# Altium PCB PCB1.PcbDoc
Units mm, origin at the board's own origin, x right, y up, seen from the top; angles counter-clockwise.
Board outline 28 x 23.8 mm, 2 copper layers (Top Layer, Bottom Layer), stack 1.67 mm thick; 29 components, 25 nets, 135 pads, 35 vias.
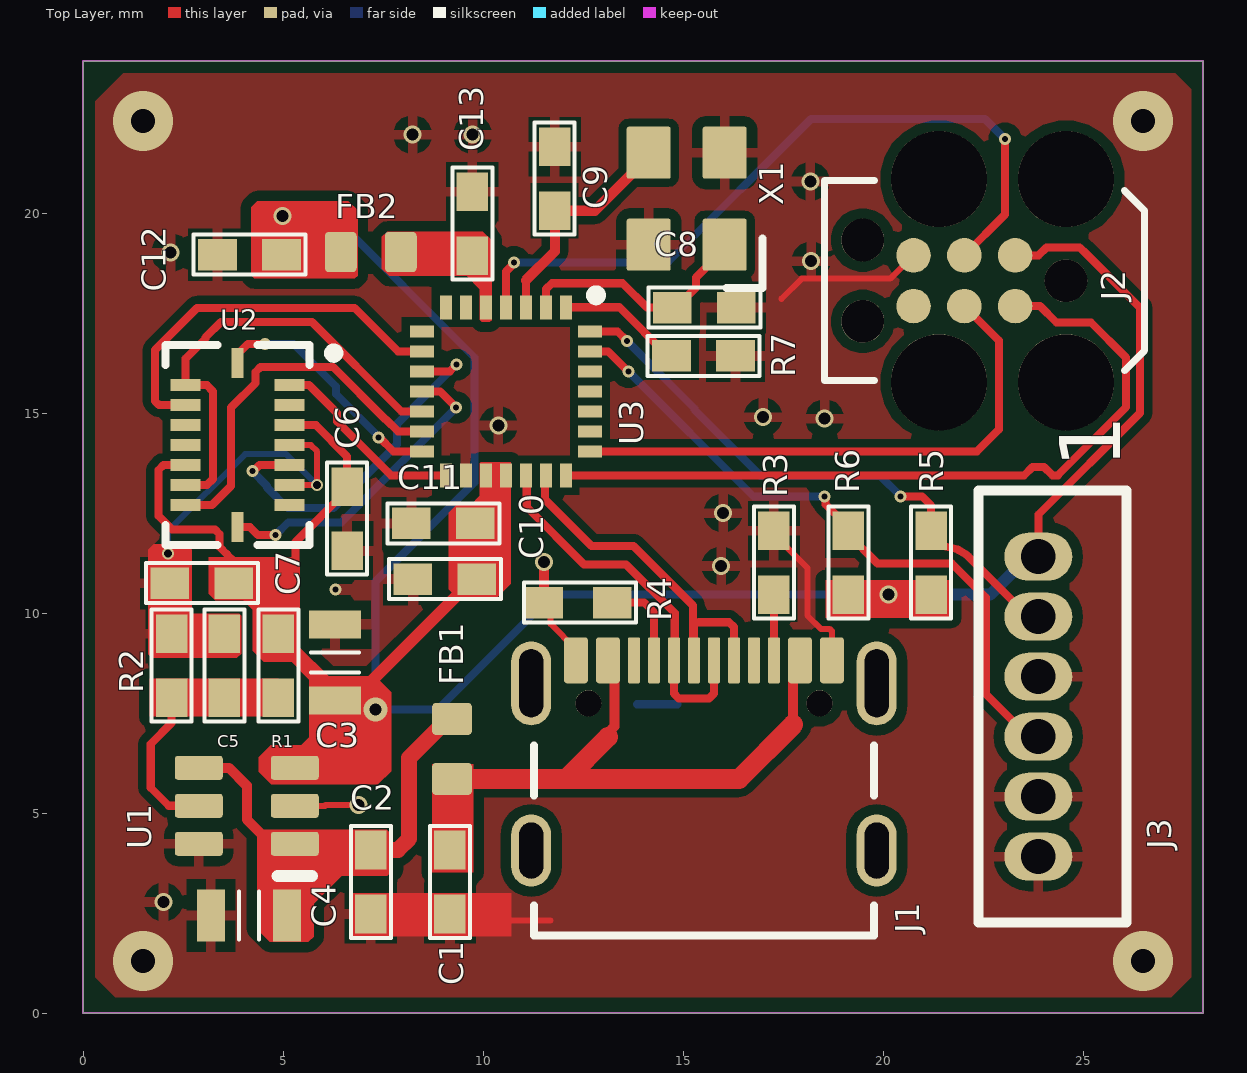
[diagram p0: Top Layer view]
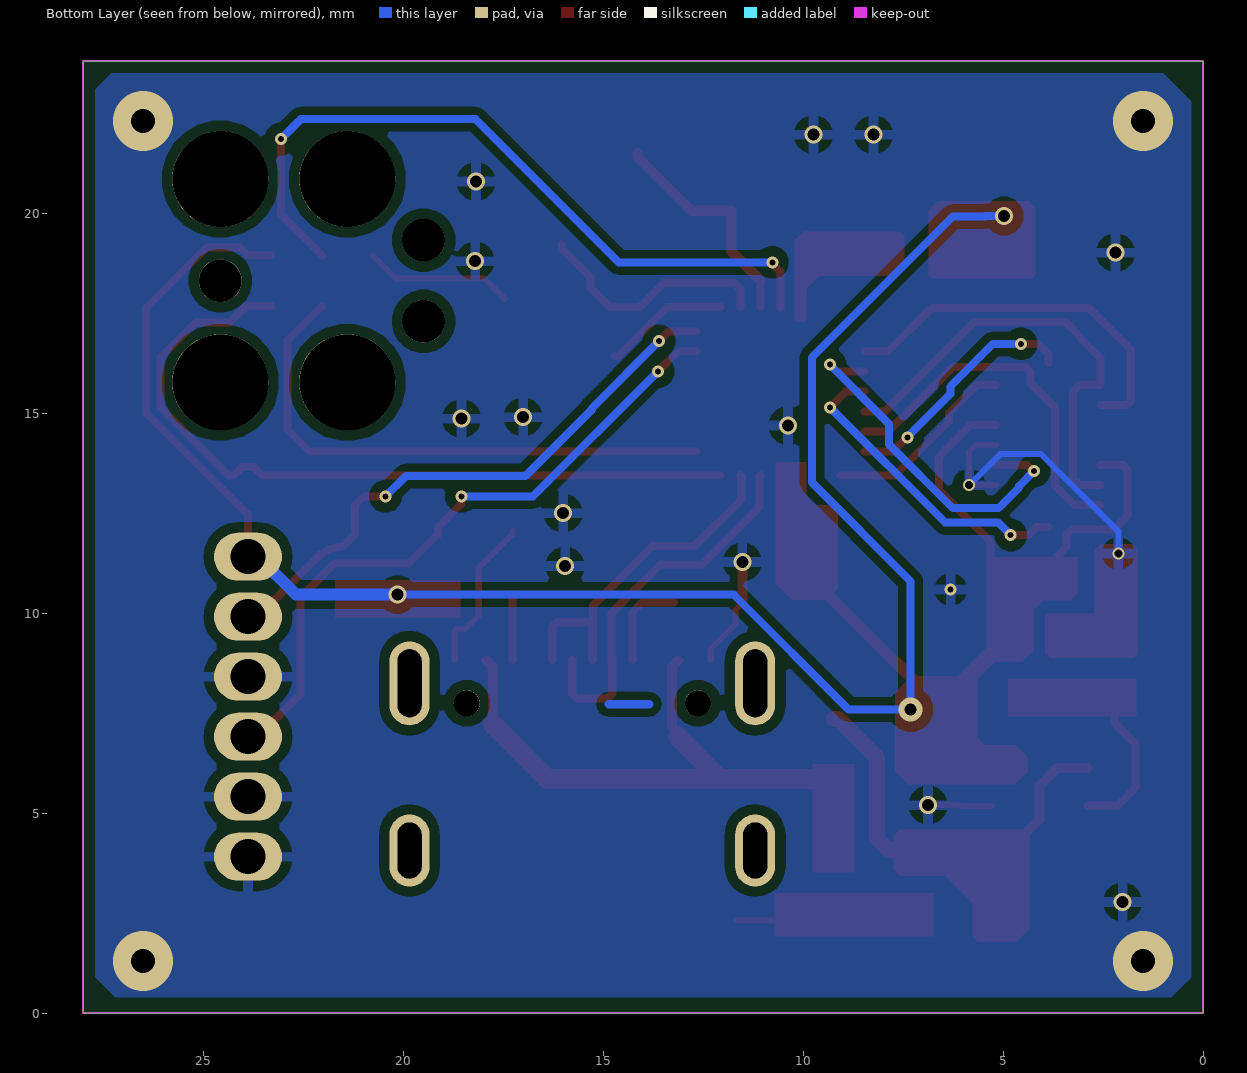
[diagram p1: Bottom Layer view, seen from below]
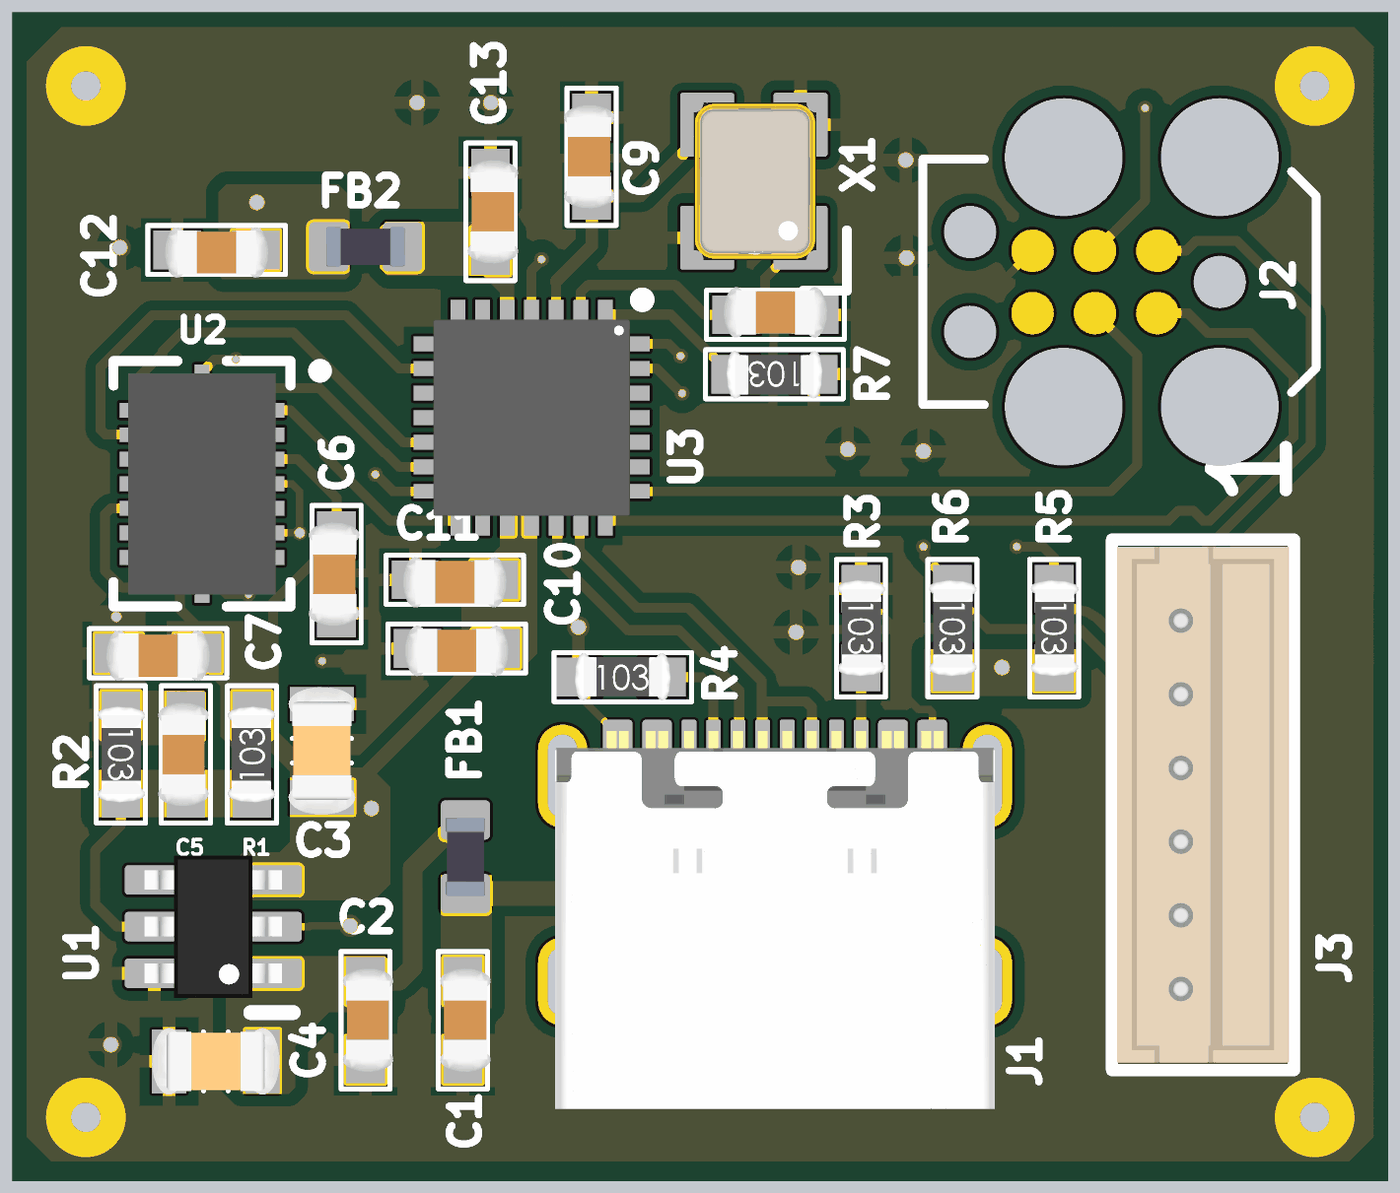
[diagram p2: 3D render of the assembled board from above, using the file's embedded part models]

## Layer stack, top to bottom
Top Solder: solder mask 0.0254, SM-001, Dk 4
Top Layer: signal copper 0.035
Dielectric 1: core 1.6, Core-043, Dk 4.3
Bottom Layer: signal copper 0.035
Bottom Solder: solder mask 0.0254, SM-001, Dk 4

## Board outline
0,0 0,23.8 28,23.8 28,0

## Design rules (kind name [scope] priority, off if disabled: settings)
Clearance [All] p1: gap=0.2 ignorepadtopadclearanceinfootprint=FALSE except(0.15: Arc-Hole Track-Hole SMDPad-Hole THPad-Hole Via-Hole; 0.152: Arc-Arc Arc-Track Track-Track; 0.203: THPad-Via; 0.254: THPad-Fill THPad-Poly THPad-Region THPad-Text Via-Via Via-Fill Via-Poly Via-Region Via-Text Fill-Fill Fill-Poly Fill-Region Fill-Text Fill-Hole Poly-Poly Poly-Region Poly-Text Poly-Hole Region-Region Region-Text Region-Hole Text-Text Text-Hole; 0.3: SMDPad-THPad THPad-THPad)
Creepage [All] p1: checkdistance=0.152 applytopolygonpour=TRUE
DiffPairsRouting [All] p1: maxlimit=0.254 minlimit=0.152 mostfreqgap=0.254 toplayer_minwidth=0.102 toplayer_maxwidth=0.381 toplayer_prefwidth=0.203 bottomlayer_minwidth=0.102 bottomlayer_maxwidth=0.381 bottomlayer_prefwidth=0.203 maxuncoupledlength=12.7
MinimumSolderMaskSliver [All] p1: minsoldermaskwidth=0.01
PolygonConnect [All] p1: connectstyle=Relief reliefconductorwidth=0.254 reliefentries=4 polygonreliefangle="90 Angle" airgapwidth=0.254
RoutingCorners [All] p1: cornerstyle=45-Degree minsetback=0.381 maxsetback=0.381
RoutingVias [All] p1: holewidth=0.711 width=1.27 viastyle="Through Hole" minholewidth=0.711 minwidth=1.27 maxholewidth=0.711 maxwidth=1.27
SMDEntry [All] p1: side=TRUE corner=TRUE anyangle=FALSE
SMDNeckDown [All] p1: percent=75.000
SMDToCorner [All] p1: distance=60000
SilkToSilkClearance [All] p1: silktosilkclearance=0.152
SilkToSolderMaskClearance [IsPad] p1: minsilkscreentomaskgap=0.01 clearancetoexposedcopper=TRUE
SolderMaskExpansion [All] p1: expansion=0.06 istentingtop=FALSE
Width [All] p1: maxlimit=0.5 minlimit=0.152 preferedwidth=0.203 minimp=50.000000 maximp=50.000000 favimp=50.000000
25 further rules are at their usual default settings.

## Classes and differential pairs
differential pair USB: +USB_P -USB_N

## Components (designator, comment, footprint, x,y, rotation, side; value= is the part's Value field where it differs from the comment)
C1 "100n" CAP_0603 9.172,3.278 r90 top
C2 "100n" CAP_0603 7.191,3.278 r90 top
C3 "4.7uF" CAP_0805 6.302,8.764 r270 top
C4 "4.7uF" CAP_0805 4.143,2.44 r0 top
C5 "22pF" CAP_0603 3.534,8.688 r270 top
C6 "100n" CAP_0603 6.6,12.36 r270 top
C7 "100n" CAP_0603 2.97,10.75 r0 top
C8 "10P" CAP_0603 15.53,17.64 r180 top
C9 "10P" CAP_0603 11.79,20.86 r270 top
C10 "100n" CAP_0603 9.007,12.244 r0 top
C11 "100n" CAP_0603 9.045,10.847 r0 top
C12 "100n" CAP_0603 4.16,18.96 r0 top
C13 "100n" CAP_0603 9.731,19.737 r90 top
FB1 "120R" FB_0603 9.223,6.605 r90 top
FB2 "120R" FB_0603 7.191,19.026 r0 top
J1 "USB4105-GF-A-060" USB4105-GF-A-060 15.52,6.443 r0 top
J2 "TC2030" TC2030-FP 22.03,18.31 r180 top
J3 "64800611622" 64800611622 23.879,7.663 r270 top
R1 "780k" RES_0603#1 4.88,8.688 r90 top
R2 "280k" RES_0603#1 2.213,8.688 r270 top
R3 "5k1" RES_0603#1 17.27,11.26 r270 top
R4 "5k1" RES_0603#2 12.424,10.263 r0 top
R5 "5k1" RES_0603#1 21.2,11.26 r270 top
R6 "5k1" RES_0603#1 19.13,11.26 r270 top
R7 "5k1" RES_0603#1 15.51,16.43 r180 top
U1 "LTC3405ES6#TRMPBF" SOT-23-6 4.092,5.183 r90 top
U2 "BMI088" BMI088 3.864,14.2 r270 top
U3 "STM32F042G6U6" UFQFPN-28 10.569,15.546 r270 top
X1 "24MHz" XTAL_3225 15.09,20.36 r90 top

## Footprints (in the part's own frame and the unit in brackets; to place one, negate y for a bottom-side part, rotate by r counter-clockwise, add the part's x,y. Pads: shape width x height; smd on the part's side, far side on the other; paste and mask are expansions set on the pad)
64800611622 [mm]
  oval 1.2x1.7 hole 0.87 mask+0.05: 1(-3.75,0) 2(-2.25,0) 3(-0.75,0) 4(0.75,0) 5(2.25,0) 6(3.75,0)
  silkscreen extent -5.4,-1.5 5.4,2.2, body extent -5.25,-1.4 5.25,2.1, height 4.75
BMI088 [mm]
  rect 0.3x0.75 smd: 1(-1.5,1.3) 2(-1,1.3) 3(-0.5,1.3) 4(0,1.3) 5(0.5,1.3) 6(1,1.3) 7(1.5,1.3) 9(1.5,-1.3) 10(1,-1.3) 11(0.5,-1.3) 12(0,-1.3) 13(-0.5,-1.3) 14(-1,-1.3) 15(-1.5,-1.3)
  rect 0.75x0.3 smd: 8(2.05,0) 16(-2.05,0)
  silkscreen extent -2.5,-1.8 2.5,2.51, body extent -2.25,-1.5 2.25,1.5, height 1.01
CAP_0603 [mil]
  rect 38x31 smd mask+1.97: 1(-31.5,0) 2(31.5,0)
  silkscreen extent -55,-20 55,20, body extent -41,-22 41,18, height 31
CAP_0805 [mm]
  rect 0.7x1.3 smd mask+0.05: 1(-0.95,0) 2(0.95,0)
  silkscreen extent -0.25,-0.6 0.25,0.6, body extent -1.3,-0.68 1.3,0.68, height 0.9
FB_0603 [mm]
  rrect25% 0.8x1 smd: 1(-0.75,0) 2(0.75,0)
  body extent -0.8,-0.4 0.8,0.4, height 0.81
RES_0603#1 [mil]
  rect 38x31 smd mask+1.97: 1(-31.5,0) 2(31.5,0)
  silkscreen extent -55,-20 55,20, body extent -39,-19 39,20, height 17
RES_0603#2 [mil]
  rect 38x31 smd mask+1.97: 1(-36,0) 2(31.5,0)
  silkscreen extent -55,-20 55,20, body extent -39,-19 39,20, height 17
SOT-23-6 [mm]
  rrect25% 0.6x1.2 smd: 1(-0.95,-1.2) 2(0,-1.2) 3(0.95,-1.2) 4(0.95,1.2) 5(0,1.2) 6(-0.95,1.2)
  silkscreen extent -1.75,-1.63 -1.75,-0.76, body extent -1.45,-1.4 1.45,1.4, height 1.45
TC2030-FP [mm]
  round 0.863 smd paste-0.432: 1(-1.27,-0.635) 2(-1.27,0.635) 3(0,-0.635) 4(0,0.635) 5(1.27,-0.635) 6(1.27,0.635)
  round 2.4 hole 2.4 unplated: MH(-2.54,2.54) MH(-2.54,-2.54) MH(0.635,2.54) MH(0.635,-2.54)
  round 1.067 hole 1.067 unplated: MH(-2.54,0) MH(2.54,-1.016) MH(2.54,1.016)
  silkscreen extent -4.5,-2.5 3.5,2.5
UFQFPN-28 [mm]
  rect 0.6x0.3 smd mask+0.06: 1(-2.1,1.5) 2(-2.1,1) 3(-2.1,0.5) 4(-2.1,0) 5(-2.1,-0.5) 6(-2.1,-1) 7(-2.1,-1.5) 15(2.1,-1.5) 16(2.1,-1) 17(2.1,-0.5) 18(2.1,0) 19(2.1,0.5) 20(2.1,1) 21(2.1,1.5)
  rect 0.3x0.6 smd mask+0.06: 8(-1.5,-2.1) 9(-1,-2.1) 10(-0.5,-2.1) 11(0,-2.1) 12(0.5,-2.1) 13(1,-2.1) 14(1.5,-2.1) 22(1.5,2.1) 23(1,2.1) 24(0.5,2.1) 25(0,2.1) 26(-0.5,2.1) 27(-1,2.1) 28(-1.5,2.1)
  silkscreen extent -2.52,2.13 -2.28,2.38, body extent -2,-2 2,2, height 0.6
USB4105-GF-A-060 [mm]
  rrect25% 0.6x1.15 smd mask+0.05: A1B12(-3.2,2.378) A4B9(-2.4,2.378) B1A12(3.2,2.378) B4A9(2.4,2.378)
  rrect25% 0.3x1.15 smd mask+0.05: A5(-1.25,2.378) A6(-0.25,2.378) A7(0.25,2.378) A8(1.25,2.378) B5(1.75,2.378) B6(0.75,2.378) B7(-0.75,2.378) B8(-1.75,2.378)
  round 0.65 hole 0.65 unplated mask+0.05: MH(-2.89,1.303) MH(2.89,1.303)
  oval 1x1.8 hole 0.6 slot 1.4 at 90 deg: SH(-4.32,-2.377) SH(4.32,-2.377)
  oval 1x2.1 hole 0.6 slot 1.7 at 90 deg: SH(-4.32,1.803) SH(4.32,1.803)
  silkscreen extent -4.25,-4.5 4.25,0.25, body extent -4.47,-4.97 4.47,2.73, height 3.27
XTAL_3225 [mm]
  rrect10% 1.3x1.1 smd: 1(-1.15,-0.95) 2(1.15,-0.95) 3(1.15,0.95) 4(-1.15,0.95)
  silkscreen extent -2.23,-1.89 -1,-1, body extent -1.6,-1.28 1.6,1.23, height 0.61

## Part data
C1 C2 C5 C6 C7 C8 C9 C10 C11 C12 C13: library part CAP_0603, "Capacitor SMD 0603"
C3 C4: library part CAP_0805, "Capacitor SMD 0805"
FB1 FB2: library part FB_0603, "Ferrite Bead SMD 0603"
J1: "USB Connector Type C SMT 12 Pin", Manufacturer=GCT, Distributor Link=https://eu.mouser.com/ProductDetail/GCT/USB4105-GF-A-060?qs=QNEnbhJQKvY2mocwNJzgfA%3D%3D, Manufacturer Part Number=USB4105-GF-A-060
J2: "Tag-Connect No-Solder SWD Debug Connector DO NOT PLACE", Manufacturer=Tag-Connect, Manufacturer Part Number=TC2030
J3: library part 64800611622_conn_6pin, "1.50mm 6PIN Connector", Manufacturer="Wurth Electronics", Supplier Part Number 1=2138726, Manufacturer Part Number=64800611622, Pricing 1="1000=0,29900, 2000=0,28200 (GBP)", RoHS=No, Stock 1=100, Supplier 1=RSComponents
R1 R2 R3 R4 R5 R6 R7: library part RES_0603, "Resistor SMD 0603"
U1: "1.5MHz, 300mA / Synchronous Step-Down / Regulator in ThinSOT", Manufacturer="Analog Devices", Manufacturer Part Number=LTC3405ES6#TRMPBF
U2: "Inertial Measurement Unit IMU 6-Axis LGA", Manufacturer=Bosch, Manufacturer Part Number=BMI088
X1: library part TSX-3225_24.0000MF15X-AC, "Crystal SMD 24MHz 10PPM 7pF 3225", Manufacturer=Epson, Manufacturer Part Number="TSX-3225 24.0000MF15X-AC"

## Via types
v1: diameter 0.45, hole 0.3, Top Layer to Bottom Layer, tented top, 15 vias
v2: diameter 0.3, hole 0.15, Top Layer to Bottom Layer, tented top, 13 vias
v3: diameter 1.5, hole 0.6, Top Layer to Bottom Layer, 4 vias
v4: diameter 0.3, hole 0.2, Top Layer to Bottom Layer, tented top, 2 vias
v5: diameter 0.6, hole 0.3, Top Layer to Bottom Layer, tented top, 1 vias

## Nets (pads, with @x,y where several pads share a name; then routed paths per layer and width w, separated by ;. In a path a pad name is that pad's centre, name@x,y a point inside that pad or via, vN(x,y) a via of type N, cw(c..) or ccw(c..) an arc to the next point about the centre after c; other vN are vias at no path point)
+3.3V: C3.2 C6.1 C7.2 C10.2 C11.2 C12.2 FB2.1 J2.1 J3.1 R1.2 R5.2 R6.2 U1.3 U2.3 U2.11 U3.17 U3.18 | length 61.9
  Top Layer w0.2: U2.11 2.006,13.7 1.889,13.583 1.889,12.426 2.225,12.09 3.297,12.09 3.414,11.973 3.414,11.651 3.591,11.473 3.593,11.473 3.77,11.296 C7.2 4.92,10.75 5.31,11.14 5.31,11.781 6.6,13.071 C6.1 6.6,13.916 5.816,14.7 U2.3 ; J2.1 23.884,18.945 24.082,19.143 24.915,19.143 25.084,18.974 26.422,17.636 26.422,15.003 23.879,12.459 J3.1
  Top Layer w0.3: C3.2 6.602,7.814 7.06,8.272 7.182,8.272 9.757,10.847 C11.2
  Bottom Layer w0.2: v1(4.98,19.93) 5.448,19.93 5.458,19.92 6.256,19.92 9.78,16.396 9.78,13.262 7.31,10.792 v5(7.31,7.59) 8.864,7.59 11.734,10.46 v1(20.14,10.46)
  Bottom Layer w0.3: v1(20.14,10.46) 22.676,10.46 23.629,11.413 J3.1
+3.3VA: C13.1 FB2.2 U3.5
+5V: C2.2 C4.2 FB1.2 U1.1 U1.4 | length 8.3
  Top Layer w0.25: U1.4 3.645,6.133 4.092,5.685 4.092,4.838 4.552,4.378 4.689,4.378 4.834,4.233 U1.1
  Top Layer w0.4: C2.2 7.868,4.078 8.15,4.36 8.15,6.382 9.123,7.355 FB1.2
+VFB: C5.2 R1.1 R2.2 U1.5 | length 3.9
  Top Layer w0.203: R2.2 2.213,7.254 1.69,6.731 1.69,5.633 2.14,5.183 U1.5
BOOT0: R7.2 U3.1 | length 3.1
  Top Layer w0.203: U3.1 13.405,17.646 14.621,16.43 R7.2
CC1: J1.A5 R4.2 | length 2.3
  Top Layer w0.2: R4.2 14.027,10.263 14.27,10.02 J1.A5
CC2: J1.B5 R3.2 | length 1.6
  Top Layer w0.2: J1.B5 R3.2
CSB1_CS: U2.14 U3.9 | length 9.6
  Top Layer w0.2: U2.14 1.897,15.2 1.799,15.298 1.799,16.579 2.85,17.63 6.79,17.63 7.874,16.546 U3.9
CSB2_CS: U2.5 U3.10 | length 9.2
  Top Layer w0.2: v2(4.23,13.55) 4.257,13.55 4.407,13.7 U2.5 ; U3.10 9.166,16.046 v2(9.33,16.21)
  Bottom Layer w0.2: v2(4.23,13.55) 4.599,13.181 4.599,13.141 5.118,12.622 6.259,12.622 7.85,14.214 7.85,14.73 v2(9.33,16.21)
GND: C1.1 C2.1 C3.1 C4.1 C5.1 C6.2 C7.1 C8.1 C9.1 C10.1 C11.1 C12.1 C13.2 J1.A1B12 J1.B1A12 J2.5 J3.3 J3.5 J3.6 R2.1 R3.1 R4.1 R7.1 U1.2 U1.6 U2.4 U2.6 U3.16 X1.2 X1.4 | length 24.4
  Top Layer w0.152: U2.6 v4(5.85,13.2) 5.85,14.041 5.691,14.2 U2.4 ; U1.2 6.045,5.183 6.062,5.2 v1(6.88,5.2) ; C2.1 C1.1 9.718,2.478 9.876,2.32 11.68,2.32 ; R4.1@11.52,10.292 11.5,10.272 11.686,10.086 11.686,9.73 12.32,9.095 J1.A1B12 ; R3.1 17.27,11.971 18.109,11.133 18.109,9.941 18.446,9.604 18.664,9.604 18.72,9.548 J1.B1A12 ; 17.46,17.86 17.961,18.361 20.176,18.361 J2.5
  Top Layer w0.25: R4.1@11.52,10.292 v1(11.52,11.28)
  Bottom Layer w0.152: v4(2.12,11.49) 2.12,12.043 4.053,13.976 5.074,13.976 v4(5.85,13.2)
  other v1: 2.01,2.78 15.95,11.18 16,12.5 10.38,14.69 18.54,14.86 17,14.9 18.2,18.8 2.19,19.01 18.18,20.79 8.24,21.96 9.74,21.96
  other v2: 6.31,10.59
  other v3: 1.5,1.3 26.5,1.3 1.5,22.3 26.5,22.3
I2C_SCL: J3.4 R6.1 U3.27 | length 16.8
  Top Layer w0.2: U3.27 13.123,16.546 13.627,16.042 v2(13.632,16.042) ; v2(18.54,12.92) 18.559,12.901 18.559,12.72 19.13,12.149 R6.1 19.13,11.971 19.859,11.242 21.718,11.242 22.567,10.393 22.567,7.975 23.629,6.913 J3.4
  Bottom Layer w0.2: v2(13.632,16.042) 16.754,12.92 v2(18.54,12.92)
I2C_SDA: J3.2 R5.1 U3.28 | length 14.6
  Top Layer w0.2: U3.28 13.354,17.046 v2(13.6,16.8) ; v2(20.44,12.92) 20.975,12.92 21.2,12.695 21.2,11.971 21.494,11.678 21.864,11.595 22.072,11.47 22.131,11.411 23.629,9.913 J3.2
  Bottom Layer w0.2: v2(13.6,16.8) 15.28,15.12 15.28,15.09 16.94,13.43 19.93,13.43 v2(20.44,12.92)
IMU_INT1: U2.16 U3.14 | length 6.2
  Top Layer w0.2: U2.16 3.864,16.475 4.122,16.733 v2(4.553,16.733) v2@4.57,16.75 ; v2(7.389,14.389) 7.411,14.389 7.754,14.046 U3.14
  Bottom Layer w0.2: v2(4.553,16.733) 5.254,16.733 6.318,15.669 6.318,15.482 7.389,14.411 v2(7.389,14.389)
IMU_INT2: U2.1 U3.15 | length 5
  Top Layer w0.2: U2.1 5.651,15.7 6.347,15.003 6.347,14.795 7.696,13.446 U3.15
MISO: U2.10 U2.15 U3.12 | length 11.6
  Top Layer w0.2: U2.10 3.091,13.2 3.248,13.356 3.248,15.544 3.091,15.7 U2.15 2.564,16.364 3.061,16.861 3.061,16.895 3.444,17.277 5.723,17.277 7.954,15.046 U3.12
MOSI: U2.9 U3.13 | length 9.3
  Top Layer w0.2: U2.9 3.221,12.7 3.7,13.179 3.7,15.137 4.314,15.751 4.314,16.033 4.431,16.15 6.252,16.15 7.562,14.839 7.576,14.839 7.869,14.546 U3.13
NetC8_2: C8.2 U3.2 X1.1 | length 6.1
  Top Layer w0.203: U3.2 11.569,18.099 11.719,18.248 13.487,18.248 14.095,17.64 C8.2 14.819,17.64 15.32,18.141 15.32,18.39 16.04,19.11 X1.1
NetC9_2: C9.2 U3.3 X1.3 | length 5.6
  Top Layer w0.2: U3.3 11.069,18.319
  Top Layer w0.254: 11.069,18.319 11.796,19.046 C9.2@11.796,19.965 ; C9.2 12.79,20.06 14.14,21.41 X1.3
NRST: J2.3 U3.4 | length 18.5
  Top Layer w0.2: U3.4 10.569,18.543 10.77,18.744 v2(10.77,18.77) ; J2.3 23.05,19.965 v2(23.05,21.85)
  Bottom Layer w0.2: v2(10.77,18.77) 14.617,18.77 18.197,22.35 22.55,22.35 v2(23.05,21.85)
SCK: U2.8 U3.11 | length 7.9
  Top Layer w0.2: U2.8 4.166,12.15 4.366,11.95 v2(4.81,11.95) ; U3.11 8.924,15.546 v2(9.328,15.142)
  Bottom Layer w0.2: v2(4.81,11.95) 5.13,12.27 6.456,12.27 v2(9.328,15.142)
SWCLK: J2.4 U3.22 | length 13.9
  Top Layer w0.2: U3.22 22.346,14.046 22.895,14.595 22.895,16.81 J2.4
SWDIO: J2.2 U3.21 | length 19.4
  Top Layer w0.2: U3.21 23.527,13.446 23.733,13.653 24.025,13.653 24.231,13.446 24.368,13.446 26.07,15.149 26.07,16.391 25.191,17.27 24.33,17.27 23.925,17.675 J2.2
USB_N: J1.A7 J1.B7 U3.19 | length 9.5
  Top Layer w0.203: U3.19 11.091,13.425 11.091,12.652 12.524,11.219 13.571,11.219 14.792,9.999 J1.B7@14.792,8.842 ; J1.B7 14.77,7.989 14.889,7.87 15.651,7.87 15.77,7.989 J1.A7
USB_P: J1.A6 J1.B6 U3.20 | length 9.4
  Top Layer w0.203: U3.20 11.548,13.425 11.548,12.841 12.713,11.676 13.761,11.676 15.249,10.188 15.249,8.842 J1.A6 15.27,9.652 ; 15.389,9.771 16.151,9.771 16.27,9.652 J1.B6
Vusb: C1.2 FB1.1 J1.A4B9 J1.B4A9 | length 14.3
  Top Layer w0.25: 13.12,6.9 13.12,7.003 13.28,7.163 13.28,8.66 J1.A4B9 ; 17.75,7.21 17.75,8.65 J1.B4A9
  Top Layer w0.5: FB1.1 12.075,5.855 ; 13.12,6.9 12.075,5.855 ; 17.75,7.21 16.395,5.855 12.075,5.855
pads on no net: J1.A8 J1.B8 J1.MH J1.SH J2.6 J2.MH U2.2 U2.7 U2.12 U2.13 U3.6 U3.7 U3.8 U3.23 U3.24 U3.25 U3.26
copper on no net: | length 1
  Bottom Layer w0.203: 13.846,7.723 14.862,7.723

## Polygon pours and split planes (outlines as drawn)
GND on Bottom Layer "GND_L02_P001" (solid, remove dead copper, pour order 1): 0.3,22.8 1,23.5 27.3,23.5 27.7,23.1 27.7,0.9 27.2,0.4 0.8,0.4 0.3,0.9
GND on Top Layer "GND_L01_P002" (solid, remove dead copper, pour order 2): 0.3,22.8 1,23.5 27.3,23.5 27.7,23.1 27.7,0.9 27.2,0.4 0.8,0.4 0.3,0.9

## Keep-outs
Keep-Out Layer:
  lines w0.05: 0,0 28,0 28,23.8 0.7,23.8 0,23.8 0,23.5 0,3.5 0,0

## Other copper
Top Layer:
  rectangle net GND: 6.74,1.92 10.71,3
  rectangle net +3.3V: 18.56,9.88 21.7,10.83
  rectangle net Vusb: 8.72,3.52 9.76,6.23
  rectangle net +VFB: 1.66,7.41 4.88,8.37
  region net +3.3V: 4.2,20.15 4.35,20.3 6.63,20.3 6.86,20.07 6.86,18.439 6.787,18.366 4.277,18.366 4.2,18.444
  region net GND: 2.57,11.72 2.71,11.58 2.71,10.02 2.74,9.99 3.9,9.99 3.95,9.94 3.95,8.99 3.84,8.88 1.72,8.88 1.63,8.97 1.63,11.58 1.77,11.72
  region net +5V: 4.35,4.58 7.59,4.58 7.74,4.43 7.74,3.58 7.6,3.44 6.46,3.44 5.76,2.74 5.76,1.91 5.63,1.78 4.67,1.78 4.35,2.1
  region net +3.3V: 3.14,11.4 4.32,11.4 5.2,11.4 5.42,11.18 5.42,9.14 6.14,8.42 7.3,8.42 7.7,8.02 7.7,6.05 7.37,5.72 4.7,5.72 4.39,6.03 4.39,6.4 4.69,6.7 5.45,6.7 5.65,6.9 5.65,8.34 5.21,8.78 4.52,8.78 4.24,9.06 4.24,10.08 4,10.32 3.309,10.321 3.14,10.49
  region net +3.3V: 9.14,10.6 9.4,10.34 10.29,10.34 10.69,10.74 10.69,13.77 9.94,13.77 9.92,13.75 9.92,12.93 9.69,12.7 9.33,12.7 9.14,12.51
  region net +3.3VA: 7.6,19.54 9.99,19.54 10.21,19.32 10.21,17.32 10.17,17.28 9.97,17.28 9.92,17.33 9.92,18.1 9.591,18.429 7.651,18.429 7.471,18.609 7.471,19.411

## Text inside footprints (layer, text, board x,y; h text height)
J3: Top Overlay "1" at 25.925,13.617 h1.52 r90